# EAGLE board 4_bit_adder (EAGLE 9.7.0)

Size 145.59 x 53.08 mm. Coordinates in mm from the lower left corner, seen from the top.
Outline: 0,0 145.59,0 145.59,53.08 0,53.08 0,0
Copper layers (1*16): Top 0.035mm / dielectric 1.5mm / Bottom 0.035mm
Design rules "default": minimum track width 6mil, minimum drill 0.35mm, track to track 6mil, track to pad 6mil, pad to pad 6mil, via to via 6mil, smd to smd 6mil, copper to edge 40mil, drill to drill 6mil, minimum pad ring 10mil, minimum via ring 8mil, stop-mask expansion 4mil, vias tented up to drill 0mil, thermal gap 10mil

## Footprints (pad centres in the part's own frame; a part is rotated, then mirrored left to right if it is on the bottom)
LEDRD254W60D565H860B = drill 0.981 pad 1.581: 1 -1.27,0; 2 1.27,0
BATTERY-GENERIC = drill 1.118 pad 3.15 octagon: + 2.54,0; - -2.54,0
RESAD1016W63L850D250B = drill 0.83 pad 1.43: 1 -5.08,0; 2 5.08,0
DIP762W53P254L1969H508Q16B = drill 0.743 pad 1.343: 1 -3.81,8.89; 2 -3.81,6.35; 3 -3.81,3.81; 4 -3.81,1.27; 5 -3.81,-1.27; 6 -3.81,-3.81; 7 -3.81,-6.35; 8 -3.81,-8.89; 9 3.81,-8.89; 10 3.81,-6.35; 11 3.81,-3.81; 12 3.81,-1.27; 13 3.81,1.27; 14 3.81,3.81; 15 3.81,6.35; 16 3.81,8.89

## Placement (x,y rotation side)
D1  RED  [LEDRD254W60D565H860B]  7.6,21.67 180 top
D2  RED  [LEDRD254W60D565H860B]  12.68,21.67 180 top
D3  RED  [LEDRD254W60D565H860B]  17.76,21.67 180 top
D4  RED  [LEDRD254W60D565H860B]  22.84,21.67 180 top
D5  RED  [LEDRD254W60D565H860B]  33,21.67 180 top
D6  RED  [LEDRD254W60D565H860B]  38.08,21.67 180 top
D7  RED  [LEDRD254W60D565H860B]  43.16,21.67 180 top
D8  RED  [LEDRD254W60D565H860B]  48.24,21.67 180 top
D9  RED  [LEDRD254W60D565H860B]  91.42,21.67 180 top
D10  RED  [LEDRD254W60D565H860B]  96.5,21.67 180 top
D11  RED  [LEDRD254W60D565H860B]  101.58,21.67 180 top
D12  RED  [LEDRD254W60D565H860B]  106.66,21.67 180 top
P1  BATTERYGENERIC  [BATTERY-GENERIC]  137.34,44.82 180 top
R1  1k  [RESAD1016W63L850D250B]  6.33,8.97 90 top
R2  1k  [RESAD1016W63L850D250B]  11.41,8.97 90 top
R3  1k  [RESAD1016W63L850D250B]  16.49,8.97 90 top
R4  1k  [RESAD1016W63L850D250B]  21.57,8.97 90 top
R5  1k  [RESAD1016W63L850D250B]  31.73,8.97 90 top
R6  1k  [RESAD1016W63L850D250B]  36.81,8.97 90 top
R7  1k  [RESAD1016W63L850D250B]  41.89,8.97 90 top
R8  1k  [RESAD1016W63L850D250B]  46.97,8.97 90 top
R9  1k  [RESAD1016W63L850D250B]  90.15,8.97 90 top
R10  1k  [RESAD1016W63L850D250B]  95.23,8.97 90 top
R11  1k  [RESAD1016W63L850D250B]  100.31,8.97 90 top
R12  1k  [RESAD1016W63L850D250B]  105.39,8.97 90 top
U1  74HC283_PDIP  [DIP762W53P254L1969H508Q16B]  68.56,10.24 90 top

## Library data of the parts
D1-D12 = Tinkercad; CATEGORY: Opto-Electronic; SUB-CATEGORY: LED; VALUE: LED_RED
P1 R1-R12 U1 = Tinkercad

## Nets
D1_C: D1.2 R1.2
D2_C: D2.2 R2.2
D3_C: D3.2 R3.2
D4_C: D4.2 R4.2
D5_C: D5.2 R5.2
D6_C: D6.2 R6.2
D7_C: D7.2 R7.2
D8_C: D8.2 R8.2
D9_C: D9.2 R9.2
D10_C: D10.2 R10.2
D11_C: D11.2 R11.2
D12_C: D12.2 R12.2
P1+: D2.1 D3.1 D5.1 D8.1 P1.+ U1.3 U1.5 U1.12 U1.14 U1.16
P1-: P1.- R1.1 R2.1 R3.1 R4.1 R5.1 R6.1 R7.1 R8.1 R9.1 R10.1 R11.1 R12.1 U1.8
U1_B0: D1.1 U1.6
U1_B1: D6.1 U1.2
U1_B2: D7.1 U1.15
U1_B3: D4.1 U1.11
U1_S0: D9.1 U1.4
U1_S1: D10.1 U1.1
U1_S2: D11.1 U1.13
U1_S3: D12.1 U1.10

## Tracks (layer width: path | path; a pad name or v marks a point on that pad's centre or on a via)
D1_C  (1 unrouted)
D2_C  (1 unrouted)
D3_C  (1 unrouted)
D4_C  (1 unrouted)
D5_C  (1 unrouted)
D6_C  (1 unrouted)
D7_C  (1 unrouted)
D8_C  (1 unrouted)
D9_C  (1 unrouted)
D10_C  (1 unrouted)
D11_C  (1 unrouted)
D12_C  (1 unrouted)
P1+  (9 unrouted)
P1-  (13 unrouted)
U1_B0  (1 unrouted)
U1_B1  (1 unrouted)
U1_B2  (1 unrouted)
U1_B3  (1 unrouted)
U1_S0  (1 unrouted)
U1_S1  (1 unrouted)
U1_S2  (1 unrouted)
U1_S3  (1 unrouted)